# Altium PCB MCP3564_breakout.PcbDoc
Units mm, origin at the board's own origin, x right, y up, seen from the top; angles counter-clockwise.
Board outline 19 x 27.5 mm, 2 copper layers (Top Layer, Bottom Layer), stack 1.534 mm thick; 3 components, 20 nets, 40 pads, 0 vias.
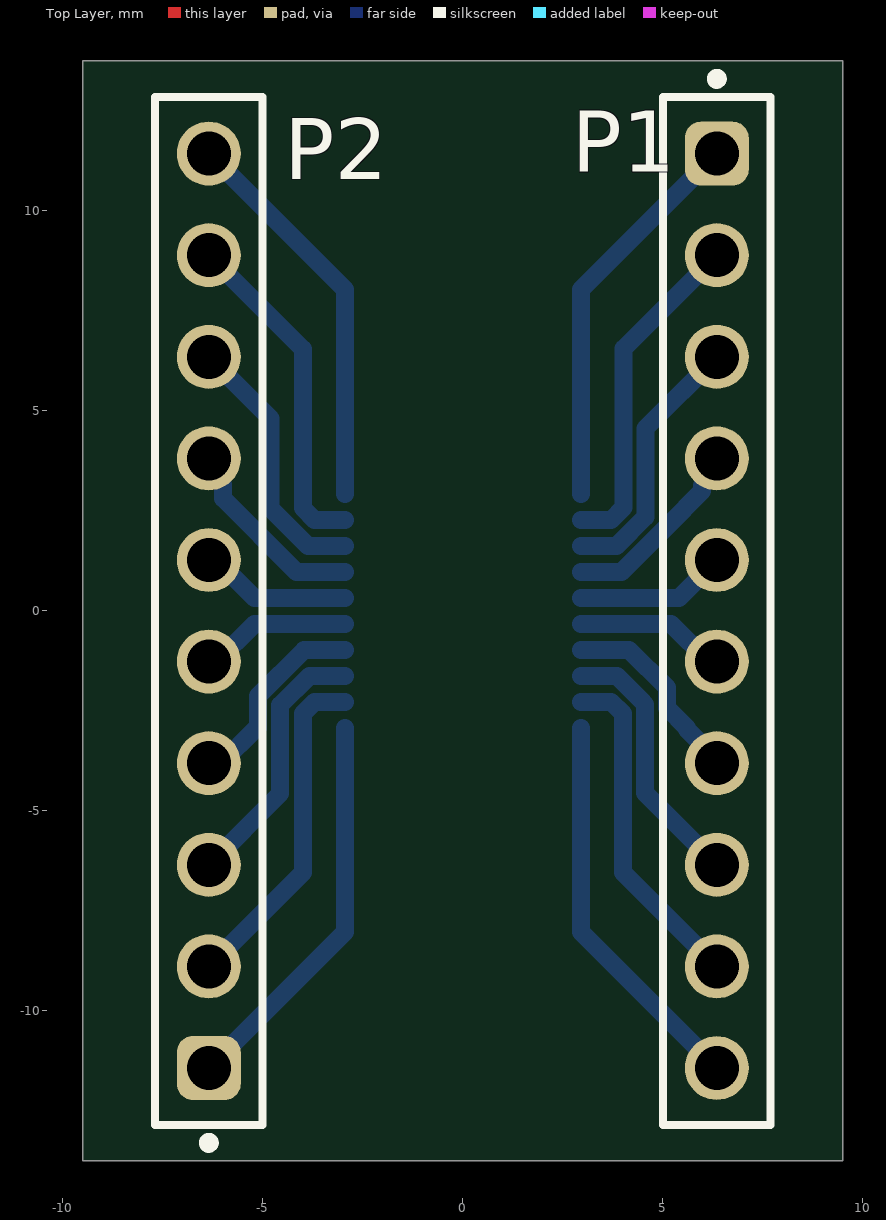
[diagram p0: Top Layer view]
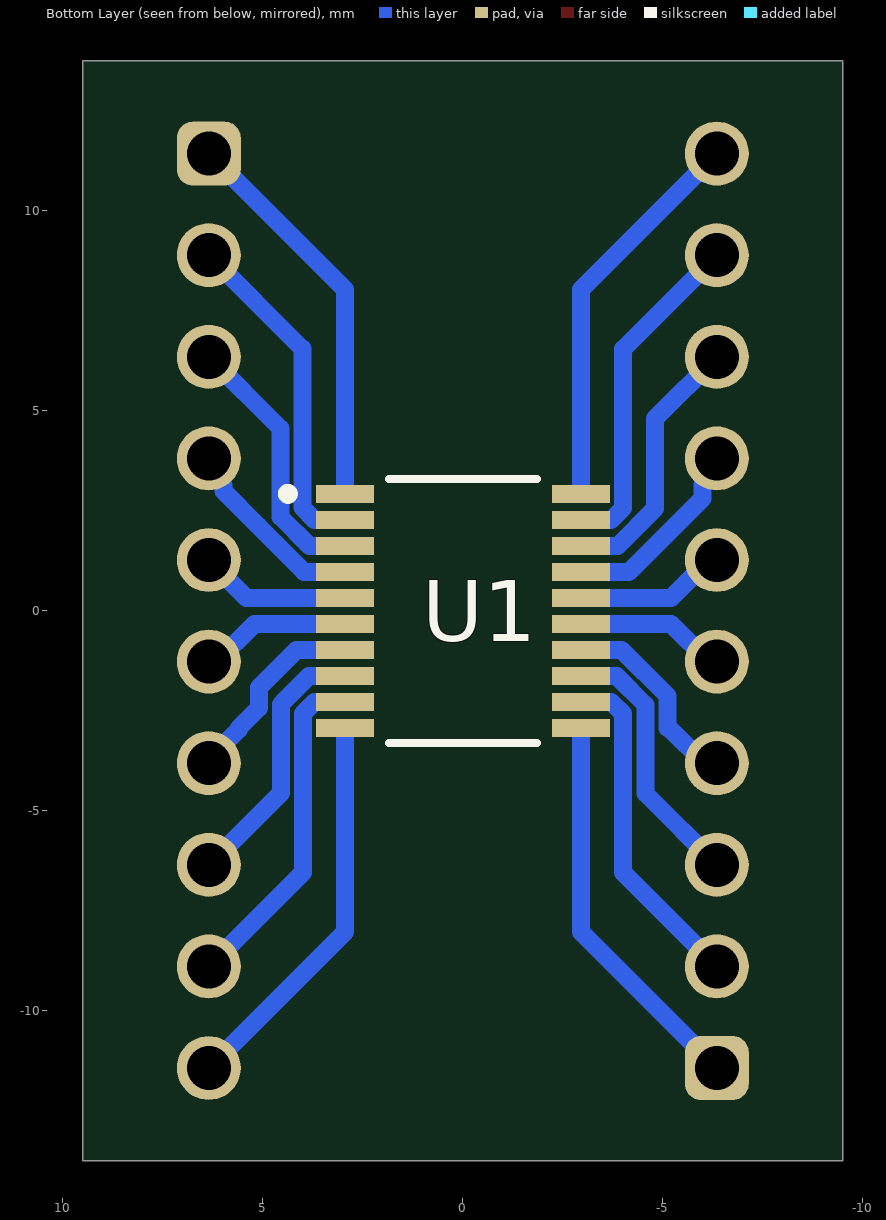
[diagram p1: Bottom Layer view, seen from below]

## Layer stack, top to bottom
Top Solder: solder mask 0.0127, Solder Resist, Dk 3.3
Top Layer: signal copper 0.0178
Dielectric1: core 1.4986, FR-4, Dk 4.3
Bottom Layer: signal copper 0.0178
Bottom Solder: solder mask 0.0127, Solder Resist, Dk 3.3

## Board outline
-9.5,-13.75 -9.5,13.75 9.5,13.75 9.5,-13.75

## Design rules (kind name [scope] priority, off if disabled: settings)
Clearance [All] p1: gap=0.254 ignorepadtopadclearanceinfootprint=FALSE except(0.1: Arc-Arc Arc-Track Arc-SMDPad Track-Track Track-SMDPad SMDPad-SMDPad)
DiffPairsRouting [All] p1: maxlimit=0.254 minlimit=0.254 mostfreqgap=0.254 toplayer_minwidth=0.254 toplayer_maxwidth=0.254 toplayer_prefwidth=0.254 bottomlayer_minwidth=0.254 bottomlayer_maxwidth=0.254 bottomlayer_prefwidth=0.254 maxuncoupledlength=12.7
HoleSize [All] p1: absolutevalues=TRUE maxlimit=7.62 minlimit=0.254 maxpercent=80.000 minpercent=20.000
MinimumAnnularRing [All] p1: minimumring=0.254
PasteMaskExpansion [All] p1: expansion=0.254
PlaneClearance [All] p1: clearance=0.381
PlaneConnect [All] p1: pad.planeconnectstyle=Relief pad.reliefexpansion=0.508 pad.reliefentries=4 pad.reliefconductorwidth=0.254 pad.reliefairgap=0.254 via.planeconnectstyle=Direct via.reliefexpansion=0.508 via.reliefentries=4 via.reliefconductorwidth=0.254 via.reliefairgap=0.254
PolygonConnect [All] p1: thpad.connectstyle=Relief thpad.reliefconductorwidth=0.254 thpad.reliefentries=4 thpad.polygonreliefangle="90 Angle" thpad.airgapwidth=0.254 smdpad.connectstyle=Relief smdpad.reliefconductorwidth=0.254 smdpad.reliefentries=4 smdpad.polygonreliefangle="90 Angle" smdpad.airgapwidth=0.254 via.connectstyle=Direct via.reliefconductorwidth=0.254 via.reliefentries=4 via.polygonreliefangle="90 Angle" via.airgapwidth=0.254
RoomDefinition MCP3564_breakout [InComponentClass('MCP3564_breakout')] p1: confinementstyle=ConfineIn formatcopy=TRUE lockcomponents=FALSE outline -189.586,-112.446 -138.786,-112.446 -138.786,-87.046 -189.586,-87.046
RoutingVias [All] p1: holewidth=0.254 width=0.508 viastyle="Through Hole" minholewidth=0.254 minwidth=0.508 maxholewidth=0.254 maxwidth=0.508
SMDNeckDown [All] p1 off: percent=120.000
SilkToSolderMaskClearance SilkscreenOverComponentPads [IsPad] p1: minsilkscreentomaskgap=0.254 clearancetoexposedcopper=TRUE
SolderMaskExpansion [All] p1: expansion=0.254 istentingtop=FALSE
Width [All] p1: maxlimit=1 minlimit=0.254 preferedwidth=0.5 minimp=50.000000 maximp=50.000000 favimp=50.000000
24 further rules are at their usual default settings.

## Components (designator, comment, footprint, x,y, rotation, side; value= is the part's Value field where it differs from the comment)
P1 "61301011121" 61301011121 6.35,0 r270 top
P2 "61301011121" 61301011121 -6.35,0 r90 top
U1 "MCP3564R-E/ST" FP-C04-088-MFG 0,0 r180 bottom

## Footprints (in the part's own frame and the unit in brackets; to place one, negate y for a bottom-side part, rotate by r counter-clockwise, add the part's x,y. Pads: shape width x height; smd on the part's side, far side on the other; paste and mask are expansions set on the pad)
61301011121 [mm] "Pin Header, pitch 2.54 mm, THT, Vertical, single row, 10p"
  rrect50% 1.6x1.6 hole 1.1: 1(-11.43,0)
  round 1.6 hole 1.1: 2(-8.89,0) 3(-6.35,0) 4(-3.81,0) 5(-1.27,0) 6(1.27,0) 7(3.81,0) 8(6.35,0) 9(8.89,0) 10(11.43,0)
  silkscreen extent -13.42,-1.34 12.85,1.35, body extent -12.7,-1.27 12.7,1.27, height 8.57
FP-C04-088-MFG [mm]
  rect 1.45x0.45 smd paste-2539.97 mask+0: 1(-2.95,2.925) 2(-2.95,2.275) 3(-2.95,1.625) 4(-2.95,0.975) 5(-2.95,0.325) 6(-2.95,-0.325) 7(-2.95,-0.975) 8(-2.95,-1.625) 9(-2.95,-2.275) 10(-2.95,-2.925) 11(2.95,-2.925) 12(2.95,-2.275) 13(2.95,-1.625) 14(2.95,-0.975) 15(2.95,-0.325) 16(2.95,0.325) 17(2.95,0.975) 18(2.95,1.625) 19(2.95,2.275) 20(2.95,2.925)
  silkscreen extent -4.5,-3.3 1.85,3.3, body extent -3.2,-3.25 3.2,3.25, height 1.2

## Part data
P1 P2: library part CMP-1502-01082-5, Color=Black, Contact Resistance=20mΩ, Current Rating=3A, Flammability Rating="UL94 V-0", Insulation Resistance=1GΩ, Max Operating Temperature=105°C, Min Operating Temperature=-40°C, Operating Supply Voltage=250V, Connector Type="Male Pin", Contact Gender=Male, Contact Material=Copper, Contact Mating Length=5.9944mm, Contact Plating=Gold, Gender=Male, Height=8.74mm, Housing Material=PBT, Lead Pitch=2.54mm, Length=2.54mm, Mount="Through Hole", NexarPartId=18818159, Number of Contacts=10, Number of Pins=10, Number of Positions=10, Number of Rows=1, Orientation=Vertical, Packaging=Bulk, Pitch=2.54mm, REACH SVHC=Unknown, RoHS=Compliant, System=Connector, Termination=Solder, Voltage Rating=250V, Width=25.4mm
U1: library part CMP-00252-111742343-1, "MCP3564R-E/ST 8-Channel Single ADC Delta-Sigma 153.6ksps 24-bit Serial 20-Pin TSSOP Tube", Ambient Temperature Range High=125°C, Max Junction Temperature (Tj)=150°C, Max Supply Voltage=3.6V, Min Operating Temperature=-40°C, Min Supply Voltage=1.8V, Height=1.2mm, Interface=SPI, Lifecycle Status=Production, Max Operating Temperature=125°C, NexarPartId=111742343, Number of Channels=8, Number of Converters=1, Sampling Rate=153.6ksps

## Nets (pads, with @x,y where several pads share a name; then routed paths per layer and width w, separated by ;. In a path a pad name is that pad's centre, name@x,y a point inside that pad or via, vN(x,y) a via of type N, cw(c..) or ccw(c..) an arc to the next point about the centre after c; other vN are vias at no path point)
1: P1.1 U1.1 | length 9.9
  Bottom Layer w0.45: U1.1 2.95,8.03 P1.1
2: P1.2 U1.2 | length 8.5
  Bottom Layer w0.45: U1.2 3.71,2.275 4.013,2.579 4.013,6.553 P1.2
3: P1.3 U1.3 | length 6.7
  Bottom Layer w0.45: U1.3 3.837,1.625 4.563,2.351 4.563,4.563 P1.3
4: P1.4 U1.4 | length 4.8
  Bottom Layer w0.45: U1.4 3.965,0.975 5.113,2.123 5.982,2.992 5.982,3.131 6.35,3.499 P1.4
5: P1.5 U1.5 | length 3.8
  Bottom Layer w0.45: U1.5 5.405,0.325 P1.5
6: P1.6 U1.6 | length 3.8
  Bottom Layer w0.45: U1.6 5.209,-0.325 6.154,-1.27 P1.6
7: P1.7 U1.7 | length 4.9
  Bottom Layer w0.45: U1.7 4.155,-0.975 5.1,-1.92 5.1,-2.425 5.6,-2.925 5.6,-2.971 6.35,-3.721 P1.7
8: P1.8 U1.8 | length 6.7
  Bottom Layer w0.45: U1.8 3.85,-1.625 4.5,-2.275 4.5,-2.288 4.55,-2.338 4.55,-4.55 P1.8
9: P1.9 U1.9 | length 8.5
  Bottom Layer w0.45: U1.9 3.71,-2.275 4,-2.565 4,-6.54 P1.9
10: P1.10 U1.10 | length 9.9
  Bottom Layer w0.45: U1.10 2.95,-8.03 P1.10
11: P2.1 U1.11 | length 9.9
  Bottom Layer w0.45: P2.1 -2.95,-8.03 U1.11
12: P2.2 U1.12 | length 8.5
  Bottom Layer w0.45: P2.2 -4,-6.54 -4,-2.565 -3.71,-2.275 U1.12
13: P2.3 U1.13 | length 6.7
  Bottom Layer w0.45: P2.3 -4.572,-4.572 -4.572,-2.36 -3.837,-1.625 U1.13
14: P2.4 U1.14 | length 5
  Bottom Layer w0.45: P2.4 -6.039,-3.81 -5.154,-2.925 -5.122,-2.925 -5.122,-2.132 -3.965,-0.975 U1.14
15: P2.5 U1.15 | length 3.8
  Bottom Layer w0.45: P2.5 -6.154,-1.27 -5.209,-0.325 U1.15
16: P2.6 U1.16 | length 3.8
  Bottom Layer w0.45: P2.6 -6.154,1.27 -5.209,0.325 U1.16
17: P2.7 U1.17 | length 4.9
  Bottom Layer w0.45: P2.7 -6.35,3.512 -5.99,3.152 -5.99,2.81 -4.155,0.975 U1.17
18: P2.8 U1.18 | length 6.7
  Bottom Layer w0.45: P2.8 -4.805,4.805 -4.805,2.557 -3.873,1.625 U1.18
19: P2.9 U1.19 | length 8.5
  Bottom Layer w0.45: P2.9 -4,6.54 -4,2.565 -3.71,2.275 U1.19
20: P2.10 U1.20 | length 9.9
  Bottom Layer w0.45: P2.10 -2.95,8.03 U1.20

## Silkscreen, mask and mechanical layers (free items; w line width, h text height)
Board:
  the board outline again, w0.254